# Altium PCB M_Rpl_9092_r1.PcbDoc
Units mil, origin at the board's own origin, x right, y up, seen from the top; angles counter-clockwise.
Board outline 1978.5 x 1584.8 mil, 2 copper layers (Top Layer, Top, Bottom Layer, Bottom); 39 components, 56 nets, 302 pads, 66 vias.
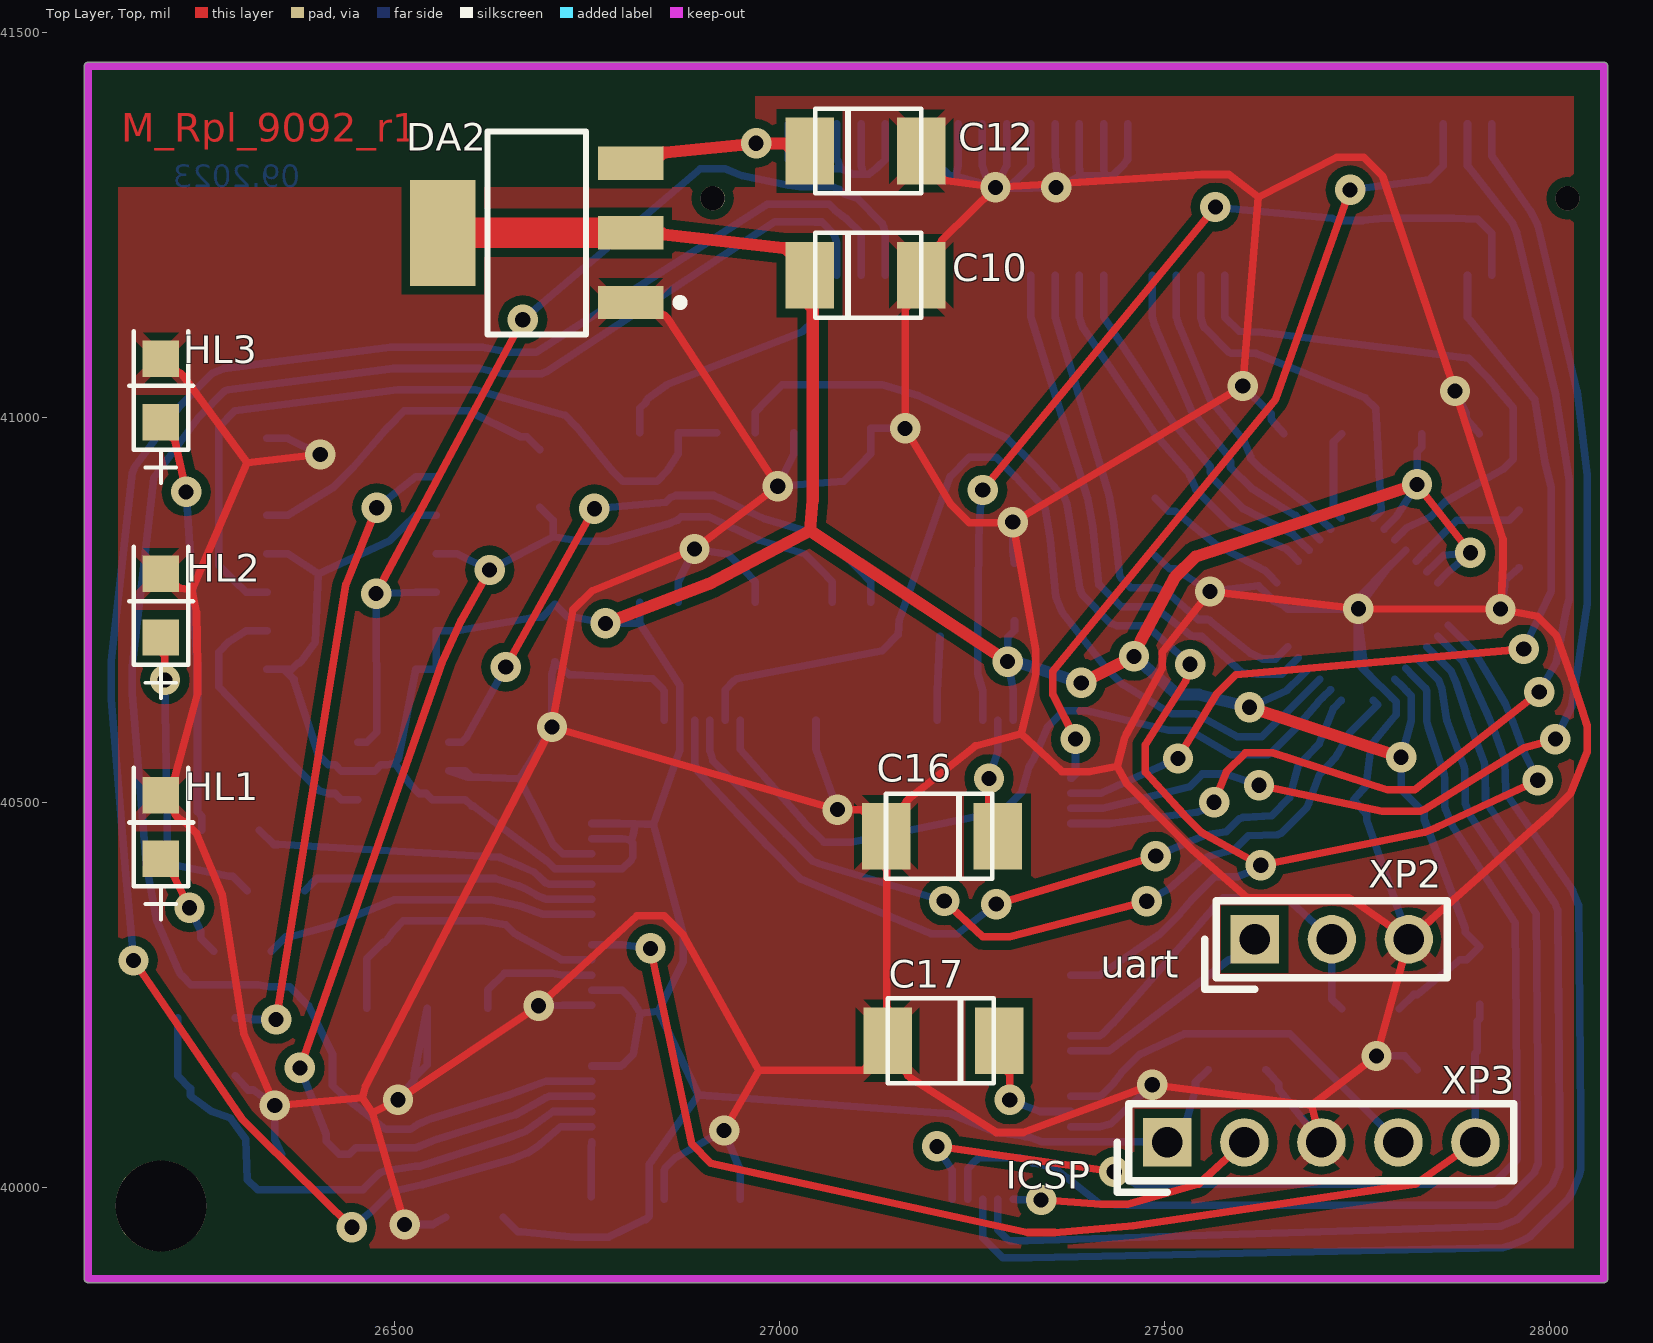
[diagram p0: Top Layer, Top view]
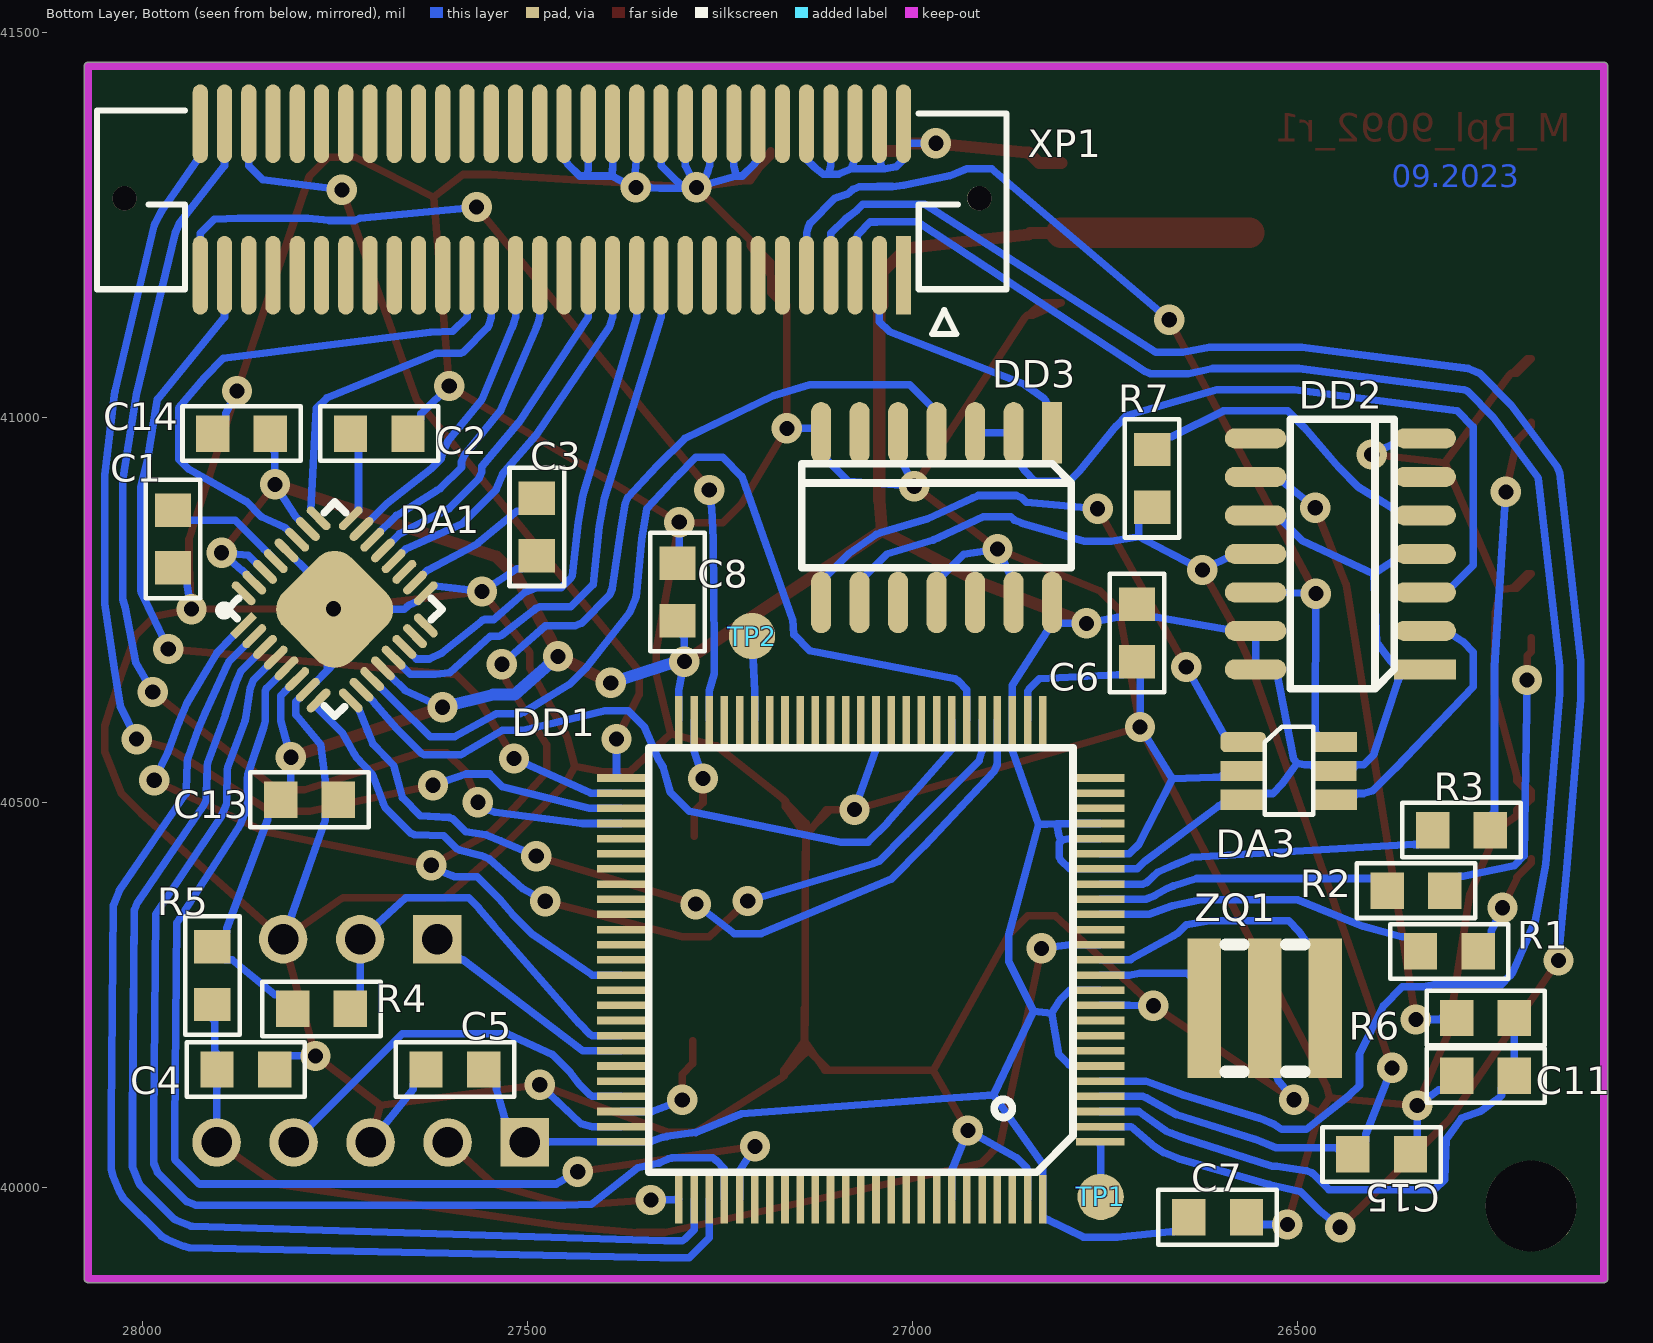
[diagram p1: Bottom Layer, Bottom view, seen from below]

## Layer stack, top to bottom
Top Solder, Top Mask: solder mask 0.4, Solder Resist, Dk 3.5
Top Layer, Top: signal copper 1.4
Dielectric 1: dielectric 12.6, FR-4, Dk 4.8
Bottom Layer, Bottom: signal copper 1.4
Bottom Solder, Bot Mask: solder mask 0.4, Solder Resist, Dk 3.5

## Board outline
26097.36,39881.89 26097.36,41456.69 cw(c26102.36,41456.69) 26102.36,41461.69 28070.87,41461.69 cw(c28070.87,41456.69) 28075.87,41456.69 28075.87,39881.89 cw(c28070.87,39881.89) 28070.87,39876.89 26102.36,39876.89 cw(c26102.36,39881.89)

## Design rules (kind name [scope] priority, off if disabled: settings)
Clearance [All] p1: gap=11.81 ignorepadtopadclearanceinfootprint=FALSE
ComponentClearance ComponentClearance_Design [All] p1: gap=9.84 collisioncheckmode=3 verticalgap=9.84 showdistances=FALSE
ComponentClearance [All] p2: gap=10 collisioncheckmode=3 verticalgap=10 showdistances=FALSE
PlaneClearance [All] p1: clearance=10
PolygonConnect PolygonConnect_2 [IsPolygon And InNet('GND') And OnLayer('Top Layer, Top') vs IsVia] p1: connectstyle=Direct reliefconductorwidth=0 reliefentries=4 polygonreliefangle="90 Angle" airgapwidth=10
PolygonConnect PolygonConnect_1 [IsPolygon And InNet('GND') And OnLayer('Top Layer, Top') vs IsPad] p2: connectstyle=Relief reliefconductorwidth=15 reliefentries=4 polygonreliefangle="45 Angle" airgapwidth=10
PolygonConnect [All] p3: connectstyle=Relief reliefconductorwidth=10 reliefentries=4 polygonreliefangle="90 Angle" airgapwidth=10
RoutingVias [All] p1: holewidth=28 width=50 viastyle="Through Hole" minholewidth=28 minwidth=50 maxholewidth=28 maxwidth=50
SolderMaskExpansion [All] p1: expansion=4 istentingtop=FALSE
Width [All] p1: maxlimit=10 minlimit=10 preferedwidth=10
28 further rules are at their usual default settings.

## Components (designator, comment, footprint, x,y, rotation, side; value= is the part's Value field where it differs from the comment)
C1 "10uF" SMD0805_C_0805(Primary) 27960.63,40842.52 r90 bottom
C2 "10uF" SMD0805_C_0805(Primary) 27692.85,40979.38 r0 bottom
C3 "10uF" SMD0805_C_0805(Primary) 27488.19,40858.27 r90 bottom
C4 "0,1u" SMD0805_C_0805(Primary) 27866.14,40153.54 r0 bottom
C5 "0,1u" SMD0805_C_0805(Primary) 27594.49,40153.54 r180 bottom
C6 "0,1u" SMD0805_C_0805(Primary) 26708.66,40720.47 r90 bottom
C7 "0,1u" SMD0805_C_0805(Primary) 26604.09,39961.73 r0 bottom
C8 "0,1u" SMD0805_C_0805(Primary) 27305.41,40773.79 r270 bottom
C10 "10,0u x 16V" COND_TC(B) 27047.24,41185.04 r0 top
C11 "270p" SMD0805_C_0805(Primary) 26255.91,40145.67 r180 bottom
C12 "10,0u x 16V" COND_TC(B) 27047.24,41346.46 r0 top
C13 "0,1u" SMD0805_C_0805(Primary) 27783.46,40503.94 r0 bottom
C14 "0,1u" SMD0805_C_0805(Primary) 27871.5,40979.43 r180 bottom
C15 "150p" SMD0805_C_0805(Primary) 26391.02,40043.48 r0 bottom
C16 "10,0u x 16V" COND_TC(B) 27275.59,40456.69 r180 top
C17 "10,0u x 16V" COND_TC(B) 27277.56,40190.94 r180 top
DA1 "TLV320AIC3254" QFN-32 27750.64,40751.17 r225 bottom
DA2 "LM1117-3.3" SOT-223_P 26685.04,41240.16 r90 top
DA3 "SN74LVC1G3157" SOT23-6 26570.87,40578.74 r180 bottom
DD1 "STM32F429VGT" LQFP100 27067.37,40295.96 r90 bottom
DD2 "74LVC74" SO14_M 26334.65,40673.23 r0 bottom
DD3 "74LVC04" SO14_M 26818.9,40980.32 r270 bottom
HL1 "Green" LED_0805 26196.85,40468.5 r90 top
HL2 "Green" LED_0805 26196.85,40755.91 r90 top
HL3 "Red" LED_0805 26196.85,41035.43 r90 top
R1 "1k" SMD0805 26303.15,40307.09 r0 bottom
R2 "1k" SMD0805 26346.46,40385.83 r0 bottom
R3 "1k" SMD0805 26287.4,40464.57 r0 bottom
R4 "7.5k" SMD0805 27767.72,40232.28 r0 bottom
R5 "7.5k" SMD0805 27909.45,40275.59 r90 bottom
R6 "22R" SMD0805 26255.91,40220.47 r180 bottom
R7 "22R" SMD0805 26688.98,40921.26 r270 bottom
TP1 "SCK" TP_RND 26755.91,39988.19 r90 bottom
TP2 "MOSI" TP_RND 27208.66,40716.54 r90 bottom
XP1 "{Value}" 5179030-2 27468.5,41283.46 r90 bottom
XP2 "uart" X3MALE 27617.51,40322.76 r180 top
XP3 "ICSP" X5MALE 27503.94,40059.06 r180 top
ZQ1 "8MHz" Z_ZTTCS_3 26542.75,40233.35 r180 bottom
ZQ1 "8MHz" Z_ZTTCS_3 26542.75,40233.35 r180 bottom

## Footprints (in the part's own frame and the unit in brackets; to place one, negate y for a bottom-side part, rotate by r counter-clockwise, add the part's x,y. Pads: shape width x height; smd on the part's side, far side on the other; paste and mask are expansions set on the pad)
5179030-2 [mm]
  rect 2.6x0.5 smd: 1(-2.5,-11.6)
  oval 2.6x0.5 smd: 2(2.5,-11.6) 3(-2.5,-10.8) 4(2.5,-10.8) 5(-2.5,-10) 6(2.5,-10) 7(-2.5,-9.2) 8(2.5,-9.2) 9(-2.5,-8.4) 10(2.5,-8.4) 11(-2.5,-7.6) 12(2.5,-7.6) 13(-2.5,-6.8) 14(2.5,-6.8) 15(-2.5,-6) 16(2.5,-6) 17(-2.5,-5.2) 18(2.5,-5.2) 19(-2.5,-4.4) 20(2.5,-4.4) 21(-2.5,-3.6) 22(2.5,-3.6) 23(-2.5,-2.8) 24(2.5,-2.8) 25(-2.5,-2) 26(2.5,-2) 27(-2.5,-1.2) 28(2.5,-1.2) 29(-2.5,-0.4) 30(2.5,-0.4) 31(-2.5,0.4) 32(2.5,0.4) 33(-2.5,1.2) 34(2.5,1.2) 35(-2.5,2) 36(2.5,2) 37(-2.5,2.8) 38(2.5,2.8) 39(-2.5,3.6) 40(2.5,3.6) 41(-2.5,4.4) 42(2.5,4.4) 43(-2.5,5.2) 44(2.5,5.2) 45(-2.5,6) 46(2.5,6) 47(-2.5,6.8) 48(2.5,6.8) 49(-2.5,7.6) 50(2.5,7.6) 51(-2.5,8.4) 52(2.5,8.4) 53(-2.5,9.2) 54(2.5,9.2) 55(-2.5,10) 56(2.5,10) 57(-2.5,10.8) 58(2.5,10.8) 59(-2.5,11.6) 60(2.5,11.6)
  round 0.8 hole 0.8 unplated: 61(0.04,14.1) 62(0.04,-14.1)
  silkscreen extent -4.44,-15 2.94,15
COND_TC(B) [mm]
  rect 1.6x2.2 smd mask-25.4: 1(-0.2,0) 2(3.48,0)
  silkscreen extent -0.02,-1.4 3.48,1.4
LED_0805 [mm]
  rect 1.2x1.2 smd: 1(-1.05,0) 2(1.05,0)
  silkscreen extent -3.05,-1.06 1.95,1.04
LQFP100 [mm]
  rect 0.25x1.6 smd: 1(-6,-7.9) 2(-5.5,-7.9) 3(-5,-7.9) 4(-4.5,-7.9) 5(-4,-7.9) 6(-3.5,-7.9) 7(-3,-7.9) 8(-2.5,-7.9) 9(-2,-7.9) 10(-1.5,-7.9) 11(-1,-7.9) 12(-0.5,-7.9) 13(0,-7.9) 14(0.5,-7.9) 15(1,-7.9) 16(1.5,-7.9) 17(2,-7.9) 18(2.5,-7.9) 19(3,-7.9) 20(3.5,-7.9) 21(4,-7.9) 22(4.5,-7.9) 23(5,-7.9) 24(5.5,-7.9) 25(6,-7.9) 51(6,7.9) 52(5.5,7.9) 53(5,7.9) 54(4.5,7.9) 55(4,7.9) 56(3.5,7.9) 57(3,7.9) 58(2.5,7.9) 59(2,7.9) 60(1.5,7.9) 61(1,7.9) 62(0.5,7.9) 63(0,7.9) 64(-0.5,7.9) 65(-1,7.9) 66(-1.5,7.9) 67(-2,7.9) 68(-2.5,7.9) 69(-3,7.9) 70(-3.5,7.9) 71(-4,7.9) 72(-4.5,7.9) 73(-5,7.9) 74(-5.5,7.9) 75(-6,7.9)
  rect 1.6x0.25 smd: 26(7.9,-6) 27(7.9,-5.5) 28(7.9,-5) 29(7.9,-4.5) 30(7.9,-4) 31(7.9,-3.5) 32(7.9,-3) 33(7.9,-2.5) 34(7.9,-2) 35(7.9,-1.5) 36(7.9,-1) 37(7.9,-0.5) 38(7.9,0) 39(7.9,0.5) 40(7.9,1) 41(7.9,1.5) 42(7.9,2) 43(7.9,2.5) 44(7.9,3) 45(7.9,3.5) 46(7.9,4) 47(7.9,4.5) 48(7.9,5) 49(7.9,5.5) 50(7.9,6) 76(-7.9,6) 77(-7.9,5.5) 78(-7.9,5) 79(-7.9,4.5) 80(-7.9,4) 81(-7.9,3.5) 82(-7.9,3) 83(-7.9,2.5) 84(-7.9,2) 85(-7.9,1.5) 86(-7.9,1) 87(-7.9,0.5) 88(-7.9,0) 89(-7.9,-0.5) 90(-7.9,-1) 91(-7.9,-1.5) 92(-7.9,-2) 93(-7.9,-2.5) 94(-7.9,-3) 95(-7.9,-3.5) 96(-7.9,-4) 97(-7.9,-4.5) 98(-7.9,-5) 99(-7.9,-5.5) 100(-7.9,-6)
  silkscreen extent -7,-7 7,7
QFN-32 [mm]
  rect 0.28x1 smd: 1(-1.75,-2.5)
  oval 0.28x1 smd: 2(-1.25,-2.5) 3(-0.75,-2.5) 4(-0.25,-2.5) 5(0.25,-2.5) 6(0.75,-2.5) 7(1.25,-2.5) 8(1.75,-2.5) 17(1.75,2.5) 18(1.25,2.5) 19(0.75,2.5) 20(0.25,2.5) 21(-0.25,2.5) 22(-0.75,2.5) 23(-1.25,2.5) 24(-1.75,2.5)
  oval 1x0.28 smd: 9(2.5,-1.75) 10(2.5,-1.25) 11(2.5,-0.75) 12(2.5,-0.25) 13(2.5,0.25) 14(2.5,0.75) 15(2.5,1.25) 16(2.5,1.75) 25(-2.5,1.75) 26(-2.5,1.25) 27(-2.5,0.75) 28(-2.5,0.25) 29(-2.5,-0.25) 30(-2.5,-0.75) 31(-2.5,-1.25) 32(-2.5,-1.75)
  rrect50% 3.2x3.2 smd: 33(0,0)
  silkscreen extent -2.65,-2.7 2.5,2.51
SMD0805 [mm]
  rect 1.1x1.2 smd: 1(-0.953,0) 2(0.947,0)
  silkscreen extent -1.95,-0.9 1.95,0.9
SMD0805_C_0805(Primary) [mm]
  rect 1.1x1.2 smd: 1(0.947,0) 2(-0.953,0)
  silkscreen extent -1.95,-0.9 1.95,0.9
SO14_M [mil]
  rect 80x26 smd: 1(0,0)
  oval 80x26 smd: 2(0,-50) 3(0,-100) 4(0,-150) 5(0,-200) 6(0,-250) 7(0,-300) 8(220,-300) 9(220,-250) 10(220,-200) 11(220,-150) 12(220,-100) 13(220,-50) 14(220,0)
  silkscreen extent 40,-325 175,25
SOT23-6 [mm]
  rrect50% 1.5x0.66 smd: 1(0,0)
  rect 1.5x0.66 smd: 2(0,-0.95) 3(0,-1.9) 4(3,-1.9) 5(2.997,-0.953) 6(3,0)
  silkscreen extent 0.71,-2.39 2.31,0.51
SOT-223_P [mm]
  rect 1.1x2.15 smd: 1(-2.3,-3.1) 2(0,-3.1) 3(2.3,-3.1)
  rect 3.5x2.15 smd: 4(0,3.1)
  silkscreen extent -3.35,-4.85 3.35,1.63
TP_RND [mil]
  round 60 smd: 1(0,0)
X3MALE [mm]
  rect 1.6x1.6 hole 1: 1(0,0)
  round 1.6 hole 1: 2(-2.54,0) 3(-5.08,0)
  silkscreen extent -6.35,-1.27 1.65,1.65
X5MALE [mm]
  rect 1.6x1.6 hole 1: 1(0,0)
  round 1.6 hole 1: 2(-2.54,0) 3(-5.08,0) 4(-7.62,0) 5(-10.16,0)
  silkscreen extent -11.43,-1.27 1.65,1.65
Z_ZTTCS_3 [mm]
  rect 1.1x4.6 smd: 1(-2,0) 2(2,0) 3(0,0)
  silkscreen extent -1.3,-2.1 1.3,2.1

## Part data
DD3: "Hex Schmitt-Trigger INVERTERS"

## Free pads (board coordinates)
  round 118.11 hole 118.11 unplated: 0(26196.85,39976.38)

## Via types
v1: diameter 39.37, hole 19.68, Top Layer, Top to Bottom Layer, Bottom, 66 vias

## Nets (pads, with @x,y where several pads share a name; then routed paths per layer and width w, separated by ;. In a path a pad name is that pad's centre, name@x,y a point inside that pad or via, vN(x,y) a via of type N, cw(c..) or ccw(c..) an arc to the next point about the centre after c; other vN are vias at no path point)
+3.3V: C5.1 C6.1 C7.1 C8.1 C10.1 C13.1 C14.1 DA1.6 DA1.12 DA1.26 DA1.30 DA1.31 DA2.2 DA2.4 DA3.3 DA3.5 DD1.6 DD1.11 DD1.19 DD1.21 DD1.22 DD1.28 DD1.50 DD1.75 DD1.100 DD2.1 DD2.4 DD2.10 DD2.13 DD2.14 DD3.14 R4.2 R5.2 XP3.1 | length 7327.8
  Top Layer, Top w9.84: v1(27828.27,40913.55) v1(27897.48,40824.73)
  Top Layer, Top w15.75: v1(26774.4,40732.96) 26908.72,40784.26 27039.91,40853.37 ; DA2.2 26847.44,41240.16 26849.41,41238.19 27004.61,41220.47 27007.87,41220.47 27039.37,41188.98 C10.1 27039.37,41145.72 27043.35,41141.73 27043.35,40892.4 27039.91,40853.37 ; v1(27296.55,40683.33) 27039.91,40853.37 ; v1(27392.05,40655.68) v1(27460.72,40690.11) 27469.2,40710.25 27513.94,40793.15 27540.46,40819.67 v1(27828.27,40913.55) ; v1(27610.6,40623.99) v1(27807.53,40559.06)
  Top Layer, Top w39.37: DA2.4 26605.31,41240.16 26764.76,41240.16 DA2.2
  Bottom Layer, Bottom w9.84: DD2.4 26361.65,40823.23 26401.39,40797.3 ; DD2.10 26527.65,40873.23 26512.89,40858.87 26494.78,40840.86 26401.39,40797.3 ; C7.1 26660.1,39943.03 26663.05,39943.03 26665.09,39943.03 26734.59,39935.55 26777.22,39935.55 26778.17,39935.94 26824.19,39958.36 26826.23,39958.36 26831.15,39963.28 DD1.100 26831.15,40016.43 26831.15,40030.7 26895.18,40120.52 ; DD1.6 26787.85,40158.17 26793.96,40158.17 26797.22,40160.13 26810.48,40173.39 26819.36,40226.83 ; DD1.11 26787.85,40256.59 26796,40256.59 26807.53,40245.06 26810.48,40241.36 26819.36,40226.83 ; DD1.21 26787.85,40453.44 26796,40453.44 26805.59,40451.99 26807.27,40450.38 ; DD1.22 26787.85,40473.13 26791.93,40473.13 26813.06,40472.69 ; DD3.14 DD3.14@26818.9,40733.32 ; DD1.50 27303.59,40638.48 27303.59,40646.63 v1(27296.55,40683.33) 27296.55,40714.83 27305.41,40723.69 C8.1 ; C5.1 27540.45,40136.81 27540.45,40129.92 27540.45,40127.88 27530.51,40092.59 27530.51,40090.55 27503.94,40063.98 XP3.1 27473.13,40059.06 27472.44,40059.74 27409.89,40059.74 DD1.75 27346.9,40059.74 27340.79,40059.74 27324.05,40065.82 27319.46,40066.63 27281.68,40071.85 27222.28,40096.16 26945.89,40116.78 26895.18,40120.52 ; v1(27610.6,40623.99) 27659.3,40645.96 27677.98,40664.59 DA1.12 ; DA1.26 27795.46,40865.59 27801.21,40871.36 v1(27828.27,40913.55) 27828.27,40955.81 27834.2,40961.74 C14.1 ; DA1.6 27809.38,40650.67 27815.13,40644.89 27820.87,40639.12 27820.87,40606.54 v1(27807.53,40559.06) 27807.53,40527.56 27807.53,40517.18 C13.1 27837.5,40487.2 27837.5,40480.32 27837.5,40478.28 27890.75,40336.59 27890.75,40334.55 27890.75,40331.59 R5.2 27892.72,40296.16 27885.83,40296.16 27883.79,40296.16 27828.71,40250.98 27826.67,40250.98 27823.72,40250.98 R4.2 ; 26401.39,40797.3 26397.28,40708.47 26379.57,40684.19 26376.69,40681.31 26374.65,40681.31 26366.57,40673.23 DD2.1 26356.72,40673.23 26369.72,40660.23 26369.72,40658.19 26400.59,40564.83 26401.89,40561.82 26414.39,40549.32 26423.34,40549.32 26431.42,40541.24 DA3.5 26474.31,40541.24 26482.39,40549.32 26491.12,40549.32 26500.85,40551.49 ; 26500.85,40551.49 26504.92,40556.36 26527.65,40673.23 DD2.14 DD2.13 26581.65,40723.23 26683,40741.04 26685.04,40741.04 26691.93,40741.04 C6.1 26725.39,40741.04 26732.28,40741.04 26734.32,40741.04 v1(26774.4,40732.96) DD3.14@26818.9,40733.32 ; 26500.85,40551.49 26520.09,40524.46 26532.54,40512.02 26541.34,40512.02 26549.42,40503.94 DA3.3 26592.31,40503.94 26600.39,40495.86 26602.43,40495.86 26698.37,40424.17 26708.55,40414.07 26724.85,40414.07 DD1.19 26787.85,40414.07 26796,40414.07 26807.53,40425.6 26809.83,40429.57 26809.83,40447.78 26807.27,40450.38 ; 26807.27,40450.38 26810.48,40458.83 26813.06,40472.69 ; 26813.06,40472.69 26836.56,40471.75 ; DD3.14@26818.9,40733.32 26870.52,40652.75 26870.52,40638.48 DD1.28 26870.52,40575.49 26870.52,40567.33 26836.56,40471.75 ; 26819.36,40226.83 26843,40229.39 ; 26836.56,40471.75 26875.07,40328.44 26875.07,40293.38 26843,40229.39 ; 26843,40229.39 26895.18,40120.52 ; DA1.30@27851.14,40809.91 DA1.30 DA1.30@27851.14,40809.91 ; DA1.30@27851.14,40809.91 27856.92,40815.66 27862.69,40821.4 v1(27897.48,40824.73) 27870.83,40801.74 DA1.31@27865.06,40795.99 ; DA1.31 DA1.31@27865.06,40795.99 ; DA1.31 DA1.31@27865.06,40795.99 ; DA1.31 DA1.31@27865.06,40795.99
  Bottom Layer, Bottom w15.75: v1(27296.55,40683.33) 27307.41,40683.33 v1(27392.05,40655.68) ; v1(27460.72,40690.11) 27517.22,40640.43 27545.01,40640.43 v1(27610.6,40623.99)
C4_9: DD3.1 XP1.3 | length 347.2
  Bottom Layer, Bottom w9.84: DD3.1 26818.9,41012.24 26826.98,41020.32 26826.98,41022.35 26829.86,41025.24 26854.14,41042.95 27030.62,41112.2 27043.31,41124.89 27043.31,41143.7 XP1.3
CS_16: DD1.51 XP1.56 | length 1078
  Top Layer, Top w9.84: v1(27384.68,40582.85) 27355.3,40640.46 27355.3,40670.91 27644.24,41023.64 v1(27741.33,41295.93)
  Bottom Layer, Bottom w9.84: DD1.51 27379.76,40532.18 27384.68,40537.1 v1(27384.68,40582.85) ; v1(27741.33,41295.93) 27843.76,41309.06 27862.2,41327.5 27862.2,41340.55 XP1.56
DAT1_15: DD1.54 XP1.58 | length 1477.3
  Top Layer, Top w9.84: v1(27564.73,40500.62) 27580.65,40540.28 27605.44,40565.07 27640.51,40565.07 27790,40516.73 27825.06,40516.73 v1(27987,40643.84)
  Bottom Layer, Bottom w9.84: DD1.54 27409.89,40473.13 27428.24,40473.13 27431.46,40473.38 27542.41,40487.58 27549.69,40490.6 27559.71,40500.62 v1(27564.73,40500.62) ; XP1.58 27893.7,41340.55 27893.7,41327.5 27952.22,41252.83 27957.68,41239.83 28008.41,41029.37 28025.86,40918.71 28025.86,40764.09 28022.63,40753.65 28009.12,40682.2 v1(27987,40643.84)
DAT2_14: DD1.53 XP1.60 | length 1500.9
  Top Layer, Top w9.84: v1(27622.98,40522.74) 27782.78,40489.17 27832.28,40489.17 27839.56,40492.19 27967.39,40571.52 v1(28007.87,40582.68)
  Bottom Layer, Bottom w9.84: DD1.53 27409.89,40492.81 27420.09,40492.81 27532.87,40520.76 27549.52,40537.32 27579.93,40537.32 v1(27622.98,40522.74) ; XP1.60 27925.2,41340.55 27975.59,41268.44 27983.72,41252.83 27985.24,41249.17 28035.97,41034.51 28049.13,40925.23 28049.13,40758.63 28036.68,40674.98 28029.32,40626.31 v1(28007.87,40582.68)
DST0_8: DD1.5 XP1.5 | length 2375
  Bottom Layer, Bottom w9.84: DD1.5 26724.85,40138.48 26697.36,40138.48 26647.6,40120.17 26549.65,40090.41 26530.63,40082.53 26529.73,40081.99 26520.87,40075.81 26488.89,40075.81 26432.98,40120.17 26419.72,40133.43 26419.72,40173.31 26388.88,40236.04 26364.09,40260.83 26337.42,40260.83 26323.21,40263.78 26235.84,40263.78 26224.31,40275.31 26221.36,40279.01 26191.8,40346.2 26178.05,40420.15 26159.8,40641.92 26159.8,40676.98 26187.36,40921.3 26246.44,41001.47 26279.41,41034.43 26284.22,41036.43 26498.74,41063.98 26610.55,41063.98 26642.06,41057.39 26691.57,41057.39 26698.84,41060.41 26994.06,41254.3 27029.14,41254.3 27046.79,41254.26 27054.86,41254.26 27071.19,41237.93 27074.8,41226.38 XP1.5
DSTI_7: DD1.2 XP1.7 | length 2572.1
  Top Layer, Top w9.84: v1(26161.42,40295.28) 26302.49,40089.22 26327.28,40064.43 v1(26444.88,39948.82)
  Bottom Layer, Bottom w9.84: v1(26161.42,40295.28) 26150.49,40414.63 26132.24,40634.7 26132.24,40684.2 26159.8,40928.52 26162.82,40935.79 26223.08,41017.08 26263.79,41057.79 26278.74,41063.98 26494.58,41091.54 26614.71,41091.54 26649.28,41084.95 26684.35,41084.95 26984.53,41277.31 27038.67,41277.31 27051.36,41277.23 27061.2,41277.23 27064.27,41277.23 27064.56,41277.11 27071.77,41269.94 27087.85,41257.87 27106.3,41239.43 27106.3,41226.38 XP1.7 ; v1(26444.88,39948.82) 26470.77,39969.67 26495.91,39994.68 26536.94,40004.28 26538.87,40004.77 26654.68,40037.74 26673.7,40045.63 26674.59,40046.17 26685.48,40053.14 26716.7,40079.43 26724.85,40079.43 DD1.2
F0_10: DA3.6 DD2.12 XP1.9 | length 1319
  Top Layer, Top w9.84: v1(26476.38,40771.65) v1(26666.81,41127.27)
  Bottom Layer, Bottom w9.84: DA3.6 26464.36,40578.74 26477.36,40591.74 26477.36,40593.78 v1(26476.38,40771.65) 26527.65,40773.23 DD2.12 ; v1(26666.81,41127.27) 26897.48,41323.43 26929.29,41323.43 26952.42,41314.08 27011.66,41302.16 27026.64,41300.31 27045.25,41300.31 27058.09,41300.2 27068.84,41300.2 27077.57,41296.58 27085.31,41290.2 27085.43,41290.15 27097.59,41286.42 27101.26,41284.9 27133.33,41252.83 27134.84,41249.17 27137.8,41239.43 27137.8,41226.38 XP1.9
GND: C1.2 C2.2 C3.2 C4.2 C5.2 C6.2 C7.2 C8.2 C10.2 C11.2 C12.2 C13.2 C14.2 C15.2 C16.2 C17.2 DA1.7 DA1.17 DA1.28 DA1.33 DA2.1 DA3.2 DD1.10 DD1.20 DD1.27 DD1.37 DD1.74 DD1.94 DD1.99 DD2.7 DD3.5 DD3.7 DD3.11 DD3.13 HL1.2 HL2.2 HL3.2 XP1.14 XP1.16 XP1.18 XP1.20 XP1.22 XP1.24 XP1.26 XP1.28 XP1.30 XP2.3 XP3.3 ZQ1.3@26542.75,40233.35 | length 15895.5
  Top Layer, Top w9.84: v1(26403.81,40952.41) 26309.01,40941.64 ; v1(26513.44,39952.36) 26471.69,40097.4 ; v1(26928.36,40074.46) 26973.3,40152.44 ; XP3.3 27691.09,40107.27 ; HL1.2 26215.55,40491.14 HL1.2@26215.55,40486.22 ; HL1.2 26196.85,40514.76 26215.55,40533.46 ; HL1.2 26196.85,40504.92 HL1.2@26215.55,40486.22 ; HL1.2 26215.55,40528.54 26215.55,40533.46 ; HL1.2@26215.55,40486.22 26215.55,40484.18 26218.43,40481.3 26229.85,40473.43 26243.11,40460.17 26276.44,40381.26 26304.23,40200.97 v1(26344.81,40106.75) 26458.55,40116.66 ; 26215.55,40533.46 26215.55,40535.5 26244.45,40641.92 26244.45,40676.98 26243.11,40747.57 26237.2,40776.72 ; HL2.2@26220.47,40778.54 26201.77,40797.24 HL2.2 26215.55,40778.54 HL2.2@26220.47,40778.54 ; HL2.2@26220.47,40778.54 26222.51,40778.54 26237.2,40776.72 ; HL3.2@26220.47,41058.07 26201.77,41076.77 HL3.2 26215.55,41058.07 HL3.2@26220.47,41058.07 ; HL3.2@26220.47,41058.07 26222.51,41058.07 26225.39,41055.19 26309.01,40941.64 ; 26237.2,40776.72 26309.01,40941.64 ; 26458.55,40116.66 26462.56,40131.95 v1(26704.72,40598.43) ; 26458.55,40116.66 26471.69,40097.4 ; 26471.69,40097.4 v1(26504.88,40114.42) v1(26687.45,40236.36) 26815.22,40353.23 26850.28,40353.23 26875.07,40328.44 26973.3,40152.44 ; v1(26704.72,40598.43) v1(27075.59,40491.13) 27107.09,40491.13 ; v1(26704.72,40598.43) 26732.08,40750.5 26756.87,40775.29 v1(26889.96,40829.54) v1(26998.08,40911.15) 26854.33,41129.99 26851.45,41132.87 DA2.1@26849.41,41132.87 ; DA2.1@26849.41,41132.87 26832.68,41149.61 DA2.1 26844.49,41132.87 DA2.1@26849.41,41132.87 ; 26973.3,40152.44 27107.02,40152.56 27109.06,40152.56 ; 27107.09,40491.13 27138.58,40459.63 C16.2 ; 27107.09,40491.13 27112.01,40491.13 C16.2 ; 27109.06,40152.56 27140.55,40184.06 C17.2 ; 27109.06,40152.56 27113.98,40152.56 C17.2 ; C16.2 27165.16,40495.08 27165.16,40500 ; C16.2 27138.58,40473.43 27165.16,40500 ; C16.2 27138.58,40414.37 27139.57,40413.39 ; C16.2 27139.57,40418.31 27139.57,40413.39 ; 27139.57,40234.25 27140.55,40233.27 C17.2 ; 27139.57,40234.25 27139.57,40229.33 C17.2 ; 27139.57,40234.25 27139.57,40413.39 ; C17.2 27140.55,40174.21 27167.13,40147.64 ; C17.2 27167.13,40152.56 27167.13,40147.64 ; C10.2@27163.39,41141.73 v1(27163.39,40986.28) 27221.85,40888.64 27246.64,40863.85 27281.7,40863.85 v1(27303.25,40864.44) ; C10.2@27163.39,41141.73 27184.25,41162.59 C10.2 ; C10.2@27163.39,41141.73 27163.39,41146.65 C10.2 ; 27165.16,40500 27165.16,40502.04 27168.04,40504.92 27254.82,40573.82 27314.1,40589.51 ; 27167.13,40147.64 27167.13,40145.6 27170.01,40142.72 27281.68,40071.85 27316.74,40071.85 v1(27484.25,40133.86) 27691.09,40107.27 ; C10.2 27184.25,41201.77 27210.83,41228.35 ; C10.2 27210.83,41223.43 27210.83,41228.35 ; 27210.83,41228.35 27210.83,41230.39 27213.71,41233.27 v1(27280.81,41299.21) ; C12.2@27215.75,41308.07 27184.25,41339.57 C12.2 27210.83,41308.07 C12.2@27215.75,41308.07 ; C12.2@27215.75,41308.07 27217.79,41308.07 v1(27280.81,41299.21) ; v1(27280.81,41299.21) v1@27359.25,41304.11 ; v1(27303.25,40864.44) 27333.3,40698.56 27333.3,40668.11 27314.1,40589.51 ; v1(27303.25,40864.44) v1(27601.91,41041.17) 27622.02,41286.45 ; 27314.1,40589.51 27367.15,40540.53 27402.21,40540.53 27438.93,40547.31 ; v1@27359.25,41304.11 27359.55,41303.8 v1(27359.55,41299.21) v1@27359.25,41304.11 ; v1@27359.25,41304.11 27548.77,41315.94 27583.83,41315.94 27622.02,41286.45 ; 27438.93,40547.31 27450.8,40525.44 27503.07,40472.07 27536.18,40438.96 27607.76,40376.7 27642.66,40376.7 27695.89,40376.89 27739.13,40376.89 27740.61,40376.27 XP2.3 ; 27438.93,40547.31 27447.78,40582.22 27450.8,40589.49 27497.15,40675.02 27497.15,40694.98 v1(27559.22,40774.39) v1(27751.97,40751.97) v1(27936.67,40751.53) ; 27622.02,41286.45 27723.8,41338.26 27758.86,41338.26 27783.65,41313.46 v1(27877.59,41034.68) 27939.81,40842.26 27939.81,40807.2 v1(27936.67,40751.53) ; 27691.09,40107.27 v1(27775.49,40171.24) XP2.3 ; XP2.3 28002.46,40486.87 28027.25,40511.67 28049.12,40565.59 28049.12,40599.76 28029.32,40661.37 28009.12,40717.27 27984.33,40742.06 v1(27936.67,40751.53)
  Bottom Layer, Bottom w9.84: C11.2 26310.14,40126.97 26315.06,40126.97 26317.1,40126.97 v1(26344.81,40106.75) 26344.81,40067.1 26344.81,40062.18 C15.2 ; DD2.7 26361.65,40973.23 v1(26403.81,40952.41) ; v1(26504.88,40114.42) 26526.02,40140.76 ZQ1.3@26526.02,40142.8 ; v1(26513.44,39952.36) 26544.94,39952.36 26549.86,39952.36 C7.2 ; v1(26687.45,40236.36) 26718.74,40236.91 26724.85,40236.91 DD1.10 ; DD1.20 26724.85,40433.76 26718.74,40433.76 26717.23,40435.04 26706.46,40445.82 26662.69,40531.12 ; DD1.99 26850.84,40016.43 26850.84,40022.55 26851.74,40025.81 26865,40039.07 v1(26928.36,40074.46) 26949.26,40022.55 26949.26,40016.43 DD1.94 ; DD1.27 26850.84,40638.48 26850.84,40644.59 26848.87,40647.86 26835.61,40661.12 26734.32,40666.24 26732.28,40666.24 26727.36,40666.24 C6.2 26704.72,40666.24 26704.72,40661.32 v1(26704.72,40598.43) 26662.69,40531.12 ; DD3.13 26868.9,40787.32 v1(26889.96,40829.54) 26933.66,40822.95 26954.54,40802.07 26968.9,40787.32 DD3.11 ; DD3.5 27018.9,40953.32 v1(26998.08,40911.15) 27083.66,40917.68 27104.54,40938.56 27118.9,40953.32 DD3.7 27118.9,40986.28 v1(27163.39,40986.28) ; DD1.37 27047.69,40575.49 27047.69,40569.37 v1(27075.59,40491.13) ; XP1.20@27295.27,41340.55 XP1.20 ; XP1.20 27295.28,41340.55 27295.28,41327.5 v1(27280.81,41299.21) ; v1(27303.25,40864.44) 27303.25,40832.94 27303.25,40828.02 C8.2 ; DD1.74 27409.89,40079.43 27416.01,40079.43 27430.69,40083.36 v1(27484.25,40133.86) ; C3.2 27506.89,40804.04 27511.81,40804.04 27513.85,40804.04 v1(27559.22,40774.39) DA1.17@27622.3,40782.07 ; v1(27601.91,41041.17) 27635.74,41007.92 27638.62,41005.04 27638.62,41003 27638.62,40998.08 C2.2 ; C5.2 27648.72,40134.84 27648.72,40129.92 27648.72,40127.88 XP3.3 ; v1(27775.49,40171.24) 27806.99,40171.24 27811.91,40171.24 C4.2 ; XP2.3 27762.7,40478.28 27762.7,40480.32 27762.7,40485.24 C13.2 27762.7,40522.64 27762.7,40527.56 27762.7,40529.6 27768.55,40575.2 27801.21,40614.68 27801.21,40630.98 DA1.7@27795.46,40636.75 ; v1(27877.59,41034.68) 27892.27,41005.09 27892.27,41003.05 27892.27,40998.13 C14.2 ; v1(27936.67,40751.53) 27941.93,40781.33 27941.93,40783.37 27941.93,40788.29 C1.2 ; ZQ1.3@26526.02,40142.8 26542.75,40159.54 26542.75,40233.35 26526.02,40147.72 ZQ1.3@26526.02,40142.8 ; 26600.39,40533.26 26592.31,40541.34 DA3.2 26595.47,40533.26 26600.39,40533.26 ; 26600.39,40533.26 26609.19,40533.26 26662.69,40531.12 ; XP1.14@27201.75,41334.43 27200.79,41335.39 XP1.14 27200.79,41340.55 XP1.14@27201.75,41334.43 ; XP1.14@27201.75,41334.43 27205.71,41329.54 27221.28,41313.98 27229.35,41313.98 ; 27229.35,41313.98 27232.28,41327.5 XP1.16@27232.28,41340.55 ; 27229.35,41313.98 v1(27280.81,41299.21) ; XP1.16@27232.28,41340.55 XP1.16 XP1.16@27232.28,41340.55 ; XP1.18@27263.78,41340.55 XP1.18 XP1.18@27263.78,41340.55 ; XP1.18@27263.78,41340.55 27263.78,41327.5 27266.73,41317.76 27268.25,41314.1 27280.81,41301.54 v1(27280.81,41299.21) ; v1(27280.81,41299.21) 27296.65,41299.21 27308.32,41309.06 27326.77,41327.5 XP1.22@27326.77,41340.55 ; v1(27280.81,41299.21) 27292.48,41299.21 27293.48,41298.21 27328.56,41298.21 27340.25,41298.56 27340.9,41299.21 v1(27359.55,41299.21) v1@27362.2,41299.21 ; XP1.22@27326.77,41340.55 XP1.22 XP1.22@27326.77,41340.55 ; XP1.24@27358.27,41340.55 v1@27362.2,41299.21 ; XP1.24@27358.27,41340.55 XP1.24 XP1.24@27358.27,41340.55 ; v1@27362.2,41299.21 27390.54,41313.98 ; XP1.26@27389.76,41340.55 XP1.26 XP1.26@27389.76,41340.55 ; XP1.26@27389.76,41340.55 27389.76,41327.5 27390.54,41313.98 ; 27390.54,41313.98 27421.89,41313.98 ; XP1.28@27421.26,41340.55 XP1.28 XP1.28@27421.26,41340.55 ; XP1.28@27421.26,41340.55 27421.26,41327.5 27421.89,41313.98 ; 27421.89,41313.98 27432.27,41313.98 27447.83,41329.54 XP1.30@27451.79,41334.43 ; XP1.30@27451.79,41334.43 27452.76,41335.39 XP1.30 27452.76,41340.55 XP1.30@27451.79,41334.43 ; DA1.17@27622.3,40782.07 DA1.17 ; DA1.17@27622.3,40782.07 DA1.17 ; DA1.17 27642.35,40762.02 27655.24,40756.09 27656.69,40754.65 27660.17,40751.17 DA1.33 ; DA1.33 27788.92,40803.37 27792.4,40806.85 ; DA1.33 DA1.33@27750.64,40765.09 ; DA1.33 27750.64,40681.57 27761.08,40671.13 ; DA1.33 27751.44,40751.97 v1(27751.97,40751.97) ; DA1.33 v1(27751.97,40751.97) ; DA1.33 27761.08,40671.13 ; DA1.33@27750.64,40765.09 27792.4,40806.85 ; DA1.33@27750.64,40765.09 27751.97,40763.76 v1(27751.97,40751.97) ; 27761.08,40671.13 DA1.7@27775.42,40656.8 ; DA1.7@27775.42,40656.8 DA1.7 ; DA1.7@27775.42,40656.8 DA1.7 ; DA1.7@27775.42,40656.8 DA1.7 ; DA1.7 DA1.7@27795.46,40636.75 ; DA1.7 DA1.7@27795.46,40636.75 ; DA1.7 DA1.7@27795.46,40636.75 ; 27792.4,40806.85 DA1.28@27803.26,40817.7 ; DA1.28@27803.26,40817.7 DA1.28 DA1.28@27803.26,40817.7
HSPKR+_37: DA1.23 XP1.33 | length 402.5
  Bottom Layer, Bottom w9.84: XP1.33 27515.75,41143.7 27515.75,41130.65 27518.7,41120.91 27520.22,41117.25 27559.59,41023.64 27603.52,40969.61 27604.06,40968.72 27611.95,40949.7 27612.2,40948.68 27612.27,40948.06 27612.27,40946.88 27624.82,40934.33 27682.56,40888.78 27687.15,40884.22 27705.82,40865.59 DA1.23
HSPKR-_36: DA1.22 XP1.31 | length 427.5
  Bottom Layer, Bottom w9.84: XP1.31 27484.25,41143.7 27484.25,41130.65 27487.2,41120.91 27488.72,41117.25 27535.05,41009.14 27582.27,40951.65 27585.93,40942.82 27585.93,40935.97 27613.91,40907.98 27617.83,40905.56 27670.44,40873.06 27673.22,40870.31 27676.01,40867.55 27691.9,40851.67 DA1.22
I2S_CK: DA1.2 DD1.78 | length 1631.4
  Bottom Layer, Bottom w9.84: DD1.78 27264.22,39953.44 27264.22,39935.09 27290.17,39909.15 27326.86,39909.15 27939.29,39922.24 27946.32,39924.01 27969.63,39933.67 27975.85,39937.41 28025.59,39987.14 28029.32,39993.36 28038.98,40016.67 28040.75,40023.7 28040.75,40094.41 28038.39,40366 28038.13,40367.02 28030.24,40386.04 28029.7,40386.94 27943.63,40512.09 27943.63,40516.18 27942.04,40553.3 27941.24,40558.07 27927.39,40596.43 27918.63,40617.56 27889.75,40679.88 27887.96,40682.86 27865.06,40706.35 DA1.2
I2S_MCK: DA1.1 DD1.64 DD3.4 | length 2059.3
  Top Layer, Top w9.84: v1(27533.57,40679.89) 27533.57,40668.32 27530.61,40665.36 27527.59,40658.08 27475.34,40575 27475.34,40539.93 27525.48,40484.36 27548.47,40461.37 v1(27625.21,40418.84) 27837.76,40461.61 27855.17,40468.82 v1(27984.93,40529.2)
  Bottom Layer, Bottom w9.84: DD3.4 26968.9,41007.32 26983.26,41022.07 27004.14,41042.95 27133.66,41042.95 27180.93,41028.61 27296.2,40973.04 27331.04,40938.2 27370.12,40896.47 27373.13,40889.19 27379.23,40853.74 27390.2,40778.39 27393.89,40769.46 27430,40733.36 27438.93,40729.67 27477.11,40729.67 v1(27533.57,40679.89) ; DD1.64 27409.89,40276.28 27416.01,40276.28 27494.64,40329.84 27519.43,40354.63 27536.32,40374.83 27565.43,40403.94 27594.81,40403.94 27611.94,40411.04 27619.74,40418.84 v1(27625.21,40418.84) ; DA1.1 27882.87,40716.37 27903.42,40694.92 27907.18,40688.65 27942.39,40629.52 27952.65,40604.77 27967.17,40565.82 v1(27984.93,40529.2)
I2S_SDI: DA1.5 DD1.80 | length 1526.3
  Top Layer, Top w9.84: v1(27204.75,40053.83) v1(27435.04,40020.82)
  Bottom Layer, Bottom w9.84: v1(27204.75,40053.83) 27224.85,40022.55 27224.85,40016.43 DD1.80 ; v1(27435.04,40020.82) 27463.06,40004.92 27925.56,40004.92 27927.04,40005.54 27957.45,40035.95 27958.07,40037.44 27958.07,40080.67 27955.71,40343.93 27875.92,40467.15 27873.8,40470.68 27865.04,40491.82 27864.03,40495.82 27864.03,40531.59 27863.44,40536.26 27842.77,40598.42 27840.54,40607.3 27840.54,40645.42 27839.18,40648.69 27823.3,40664.59 DA1.5
I2S_SDO: DA1.4 DD1.79 | length 1531
  Bottom Layer, Bottom w9.84: DD1.79 27244.54,40016.43 27244.54,40024.59 27256.07,40036.12 27259.77,40039.07 27308.05,40039.07 27312.8,40038.67 27317.24,40037.5 27329.37,40032.18 27357.24,40025.79 27417.51,39978.49 27451.65,39977.36 27931.04,39977.36 27942.66,39982.17 27980.82,40020.33 27985.63,40031.96 27985.63,40086.15 27983.27,40355.34 27897.3,40483.3 27890.56,40499.58 27890.56,40505.18 27890.17,40542.42 27889.37,40547 27867.13,40606.47 27866.13,40610.46 27860.2,40649.33 27855.85,40659.83 27837.22,40678.51 DA1.4
I2S_WS: DA1.3 DD1.77 | length 1534.9
  Bottom Layer, Bottom w9.84: DD1.77 27283.91,39953.44 27283.91,39945.29 27295.44,39933.76 27299.22,39931 27317.81,39931 27321.68,39931.2 27935.88,39949.8 27937.65,39950.25 27957.2,39958.36 27958.77,39959.3 28003.7,40004.22 28004.63,40005.79 28012.74,40025.34 28013.19,40027.11 28013.19,40091 28010.83,40360.86 28006.61,40371.04 27919.8,40498.33 27917.1,40504.85 27917.1,40510.94 27916.11,40548.15 27915.31,40552.91 27892.66,40614.23 27879.87,40653.24 27872.53,40670.97 27867.02,40676.54 27851.14,40692.43 DA1.3
IRQ_12: DD1.48 XP1.59 | length 1198.4
  Top Layer, Top w9.84: v1(27264.17,40906.17) v1(27566.3,41273.62)
  Bottom Layer, Bottom w9.84: v1(27264.17,40906.17) 27260.93,40881.97 27259.15,40842.32 27257.76,40699.4 27257.76,40667.26 27264.22,40645.26 27264.22,40638.48 DD1.48 ; v1(27566.3,41273.62) 27718.18,41258.86 27724.88,41256.23 27757.77,41256.23 27785.76,41258.86 27875.66,41258.86 27906.75,41257.87 27925.2,41239.43 27925.2,41226.38 XP1.59
LED_0: DD1.16 R1.2 | length 435
  Bottom Layer, Bottom w9.84: R1.2 26359.15,40325.79 26362.11,40325.79 26364.15,40325.79 26414.79,40339.57 26500.3,40374.1 26625.55,40374.1 26662.7,40366.22 26693,40355.18 26693.64,40355.02 26724.85,40355.02 DD1.16
LED_1: DD1.17 R2.2 | length 384.7
  Bottom Layer, Bottom w9.84: R2.2 26399.59,40401.66 26405.41,40401.66 26631.07,40401.66 26661.67,40391.9 26662.53,40391.57 26669,40388.9 26685.02,40379.82 26697.36,40374.7 26724.85,40374.7 DD1.17
LED_2: DD1.18 R3.2 | length 449.5
  Bottom Layer, Bottom w9.84: R3.2 26343.41,40445.87 26346.36,40445.87 26348.4,40445.87 26636.21,40429.22 26637.23,40428.96 26656.25,40421.08 26682.02,40409.78 26696.17,40396.5 26701.28,40394.39 26724.85,40394.39 DD1.18
M+_1: DA1.21 XP1.27 | length 467
  Bottom Layer, Bottom w9.84: XP1.27 27421.26,41143.7 27421.26,41130.65 27511.68,40993.53 27559.58,40937.01 27559.58,40930.17 27563.24,40921.33 27565.07,40919.27 27602.13,40882.21 27666.43,40849.24 27677.98,40837.75 DA1.21
M-_44: DA1.20 XP1.25 | length 491.3
  Bottom Layer, Bottom w9.84: XP1.25 27389.76,41143.7 27389.76,41130.65 27392.72,41120.91 27394.23,41117.25 27489.64,40976.57 27533.24,40926.1 27533.24,40924.92 27540.91,40906.41 27584.35,40862.96 27658.29,40829.57 27664.06,40823.83 DA1.20
MIC+_42: DA1.14 XP1.23 | length 664.5
  Bottom Layer, Bottom w9.84: XP1.23 27358.27,41143.7 27358.27,41130.65 27427.05,40903.11 27428.25,40898.33 27434.35,40864.4 27441.93,40794.66 27444.7,40790.88 27456.33,40779.24 27489.3,40779.24 27503.66,40773.3 27544.13,40737.97 27555.97,40737.97 27558.92,40736.75 27611.59,40694.39 27628.07,40686.68 27644.37,40686.68 27650.14,40692.43 DA1.14
MIC-_41: DA1.13 XP1.21 | length 724.7
  Bottom Layer, Bottom w9.84: XP1.21 27326.77,41143.7 27326.77,41130.65 27329.72,41120.91 27400.69,40894.67 27406.79,40859.26 27414.99,40783.5 27444.03,40754.46 27446.07,40754.45 27450.99,40754.45 27484.37,40754.46 27489.62,40752.28 27491.62,40750.37 27533.87,40717.53 27536.81,40716.31 27548.66,40716.31 27600.88,40669.28 27601.28,40669.11 27619.93,40667.02 27652.51,40667.02 27664.06,40678.51 DA1.13
NET00000: DD1.12 ZQ1.1@26621.49,40233.35 | length 167.7
  Bottom Layer, Bottom w9.84: ZQ1.1@26621.49,40233.35 26621.49,40257.03 26643.14,40278.68 26704.98,40278.68 26718.74,40276.28 26724.85,40276.28 DD1.12
NET00005: DD1.13 ZQ1.2@26464.01,40233.35 | length 392
  Bottom Layer, Bottom w9.84: ZQ1.2@26464.01,40233.35 26464.01,40297.33 26485.66,40318.98 26487.7,40318.98 26490.58,40321.87 26498.46,40333.28 26511.72,40346.54 26614.13,40346.54 26644.71,40341.81 26655.91,40330.68 26661.33,40327.44 26715.67,40297.52 26716.87,40296.37 26718.74,40295.96 26724.85,40295.96 DD1.13
NET00007: C3.1 DA1.18 | length 195.4
  Bottom Layer, Bottom w9.84: C3.1 27504.92,40878.84 27511.81,40878.84 27513.85,40878.84 27564.22,40837.23 27569.78,40833.9 27630.45,40801.74 27636.22,40795.99 DA1.18
NET00008: C2.1 DA1.24 | length 118.4
  Bottom Layer, Bottom w9.84: DA1.24 27719.74,40879.51 27719.74,40955.76 27719.74,40968.96 C2.1
NET00009: HL1.1 R1.1 | length 142.4
  Top Layer, Top w9.84: HL1.1 26196.85,40422.24 26215.55,40403.54 26215.55,40401.5 v1(26234.12,40363.73)
  Bottom Layer, Bottom w9.84: v1(26234.12,40363.73) 26248.92,40332.75 26248.92,40330.71 26248.92,40323.82 R1.1
NET00010: C1.1 DA1.29 | length 160.8
  Bottom Layer, Bottom w9.84: DA1.29 27837.22,40823.83 27842.96,40829.6 27855.35,40842.18 27880.03,40866.86 27937.01,40866.86 27947.67,40866.86 C1.1
NET00014: DD1.1 TP1.1 | length 71.7
  Bottom Layer, Bottom w9.84: TP1.1 26755.91,40054.82 26756.35,40055.26 DD1.1
NET00015: DD1.45 TP2.1 | length 109.6
  Bottom Layer, Bottom w9.84: DD1.45 27205.17,40638.48 27205.17,40644.59 TP2.1
NET00021: HL2.1 R2.1 | length 403.2
  Top Layer, Top w9.84: HL2.1 26196.85,40696.22 26202.13,40690.94 v1(26202.13,40659.45)
  Bottom Layer, Bottom w9.84: v1(26202.13,40659.45) 26205.61,40431.57 26218.87,40418.31 26285.26,40404.53 26287.3,40404.53 26290.26,40404.53 R2.1
NET00022: HL3.1 R3.1 | length 541.5
  Top Layer, Top w9.84: HL3.1 26196.85,40989.17 26215.55,40970.47 26215.55,40968.43 v1(26229.69,40903.76)
  Bottom Layer, Bottom w9.84: v1(26229.69,40903.76) 26244.45,40676.98 26244.45,40488.19 26249.9,40482.74 R3.1
NET00023: C16.1 DD1.49 | length 156.7
  Top Layer, Top w9.84: v1(27272.35,40531.5) 27272.35,40500 27283.46,40488.89 C16.1
  Bottom Layer, Bottom w9.84: v1(27272.35,40531.5) 27283.91,40567.33 27283.91,40575.49 DD1.49
NET00025: C17.1 DD1.73 | length 164.4
  Top Layer, Top w9.84: C17.1 27285.43,40161.42 27299.21,40147.64 v1(27299.21,40114.17)
  Bottom Layer, Bottom w9.84: v1(27299.21,40114.17) 27338.75,40099.11 27346.9,40099.11 DD1.73
NET00042: DD2.3 DD3.2 DD3.3 | length 1002.1
  Bottom Layer, Bottom w9.84: DD2.3 26307.65,40773.23 26292.89,40787.59 26272.01,40808.47 26272.01,40987.99 26292.89,41008.87 26504.22,41036.43 26605.07,41036.43 26721.98,41003.05 26735.24,40989.79 26783.26,40930.94 26796.52,40917.68 26836.35,40917.68 26841.19,40917.88 26854.33,40931.02 26868.9,40953.32 DD3.2 DD3.3
NET00045: DD2.5 R7.1 | length 422.8
  Bottom Layer, Bottom w9.84: DD2.5 26361.65,40873.23 26421.35,40910.09 26446.14,40934.88 26492.01,40987.99 26512.89,41008.87 26596.41,41008.87 26663.31,40975.49 26665.35,40975.49 26672.24,40975.49 R7.1
NET00047: DA3.4 DD2.2 | length 359.2
  Bottom Layer, Bottom w9.84: DD2.2 26307.65,40723.23 26285.27,40708.87 26272.01,40695.61 26272.01,40650.85 26373.03,40544.95 26402.44,40515.54 26414.58,40512.02 26423.23,40512.02 26431.31,40503.94 DA3.4
NET00049: DA3.1 DD3.8 | length 787.5
  Top Layer, Top w9.84: v1(26644.74,40676.25) v1(26759.84,40881.89)
  Bottom Layer, Bottom w9.84: DA3.1 26587.39,40578.74 26593.89,40585.24 v1(26644.74,40676.25) ; v1(26759.84,40881.89) 26852.52,40890.52 26858.16,40896.07 26865.3,40899.02 26914.63,40899.02 26921.77,40896.07 26980.55,40868.83 27042.32,40850.51 27047.14,40848.52 27083.66,40822.95 27104.54,40802.07 27118.9,40787.32 DD3.8
NET00050: DD2.9 R6.1 | length 825
  Top Layer, Top w9.84: v1(26346.56,40218.5) 26437.01,40783.46 v1(26477.24,40883.18)
  Bottom Layer, Bottom w9.84: R6.1 26313.09,40220.47 26315.06,40218.5 v1(26346.56,40218.5) ; v1(26477.24,40883.18) 26527.65,40923.23 DD2.9
RX1: DD1.69 XP2.1 | length 290
  Bottom Layer, Bottom w9.84: DD1.69 27409.89,40177.85 27428.24,40177.85 27583.97,40296.18 27586.01,40296.18 27612.59,40322.76 XP2.1
SAI1_FS_A: C11.1 DD1.3 R6.2 | length 732.7
  Bottom Layer, Bottom w9.84: R6.2 26218.6,40196.85 26218.6,40169.29 C11.1 26235.33,40128.94 26235.33,40122.05 26235.33,40120.01 26238.22,40117.13 26262.37,40099.41 26287.4,40090.55 26307.09,40062.99 26309.23,40010.48 26322.49,39997.22 26459.35,39997.22 26481.42,40019.22 26488.7,40022.24 26527.22,40028.12 26532.9,40028.12 26648.52,40065.05 26663.44,40070.59 26671.57,40073.96 26706.51,40099.11 26724.85,40099.11 DD1.3
SAI1_SCK_A: C15.1 DD1.4 DD2.11 DD3.9 R7.2 | length 1796.6
  Top Layer, Top w9.84: v1(26377.39,40155.78) 26562.99,40685.04 26586.61,40736.22 v1(26623.81,40802.41)
  Bottom Layer, Bottom w9.84: v1(26377.39,40155.78) 26411.59,40069.14 26411.59,40067.1 26411.59,40060.21 C15.1 26441.49,40043.48 26449.98,40051.97 26528.15,40051.97 26555.8,40063.11 26657.96,40095.14 26696.17,40116.68 26701.28,40118.8 26724.85,40118.8 DD1.4 ; DD2.11 26581.65,40823.23 v1(26623.81,40802.41) 26706.38,40845.57 ; R7.2 26706.38,40866.55 26706.38,40862.3 26706.38,40845.57 ; DD3.9 27068.9,40787.32 27054.54,40802.07 27033.66,40822.95 26973.33,40841.27 26966.05,40844.28 26907.41,40871.66 26872.52,40871.66 26868.05,40867.28 26858.09,40863.16 26777.37,40839.57 26742.31,40839.57 26706.38,40845.57
SCK_13: DD1.52 XP1.57 | length 1183.8
  Top Layer, Top w9.84: v1(27517.66,40557.46) 27568.28,40641.52 27593.07,40666.32 v1(27966.8,40699.74)
  Bottom Layer, Bottom w9.84: DD1.52 27409.89,40512.5 27418.05,40512.5 v1(27517.66,40557.46) ; XP1.57 27893.7,41143.7 27893.7,41130.65 27980.85,41023.84 27994,40943.47 28002.6,40909.07 28002.6,40775.77 28001.97,40773.99 v1(27966.8,40699.74)
SPI_MISO: DA1.11 DD1.31 | length 1225.9
  Bottom Layer, Bottom w9.84: DD1.31 26929.58,40638.48 26929.58,40646.63 26941.11,40658.17 26944.81,40661.12 27133.66,40697.68 27154.54,40718.56 27156.02,40737.85 27221.85,40923.7 27246.64,40948.49 27281.7,40948.49 27306.5,40923.7 27345.57,40881.97 27351.67,40842.32 27359.25,40767.66 27359.51,40766.64 27367.39,40747.62 27367.93,40746.72 27424.31,40675.03 27445.64,40653.69 27504.78,40617.87 27509.96,40615.72 27540.1,40615.72 27543.11,40614.48 27594.77,40585.77 27626.44,40585.77 27670.44,40629.28 27691.9,40650.67 DA1.11
SPI_MOSI: DA1.10 DD1.32 | length 985.9
  Bottom Layer, Bottom w9.84: DD1.32 26949.26,40575.49 26949.26,40569.37 27033.27,40473.6 27058.06,40448.81 27093.12,40448.81 27289.89,40489.17 27314.68,40513.96 27324.26,40546.48 27329.19,40554.7 27348.26,40597.93 27369.59,40619.27 27399.76,40619.27 27505.63,40593.98 27532.78,40593.98 27583.22,40564.07 27587.48,40562.3 27633.72,40562.3 27637.99,40564.07 27670.52,40596.61 27700.07,40630.98 27705.82,40636.75 DA1.10
SPI_SCK: DA1.8 DD1.30 | length 1125
  Top Layer, Top w9.84: v1(27214.3,40372.47) 27264.25,40326 27299.31,40326 v1(27477.11,40372.16)
  Bottom Layer, Bottom w9.84: DD1.30 26909.89,40575.49 26909.89,40567.33 26913.83,40554.7 27008.72,40459.1 27043.56,40424.26 27050.84,40421.25 v1(27214.3,40372.47) ; v1(27477.11,40372.16) 27506.36,40388.41 27549.96,40427.15 27559.85,40431.24 27587.93,40438.54 27592.33,40440.37 27609.3,40457.26 27646.63,40458.39 27651.87,40460.57 27685.15,40493.85 27687.33,40499.09 27701.67,40536.94 27722.87,40559.4 27725.41,40563.62 27740.68,40591.07 27776.98,40627.4 DA1.8
SPI_SS: DA1.9 DD1.29 | length 1101.1
  Top Layer, Top w9.84: v1(27281.78,40368.33) v1(27488.83,40430.73)
  Bottom Layer, Bottom w9.84: DD1.29 26890.21,40575.49 26890.21,40549.96 26893.82,40541.23 26985.36,40443.49 27027.95,40400.9 27196.77,40330.15 27231.83,40330.15 v1(27281.78,40368.33) ; v1(27488.83,40430.73) 27534.98,40450.52 27553.86,40458.35 27554.68,40458.55 27580.64,40462.2 27597.6,40479.09 27602.01,40480.91 27639.36,40483.19 27662.53,40506.36 27674.11,40548.35 27700.83,40576.35 27708.04,40593.76 27719.74,40622.83 DA1.9
SPKR+_39: DA1.27 XP1.37 | length 721.8
  Bottom Layer, Bottom w9.84: XP1.37 27578.74,41143.7 27578.74,41130.65 27597.19,41112.2 27626.67,41111.05 27895.13,41077 27919.92,41052.21 27953.3,41012.43 27953.3,40946.43 27940.04,40933.17 27865.67,40891.28 27845.72,40871.41 27815.16,40857.41 27809.38,40851.67 DA1.27
SPKR-_38: DA1.25 XP1.35 | length 468.9
  Bottom Layer, Bottom w9.84: XP1.35 27547.24,41143.7 27547.24,41130.65 27550.2,41120.91 27551.71,41117.25 27583.78,41085.18 27587.44,41083.66 27619.44,41083.49 27761.19,41025.64 27774.44,41012.38 27781.54,40879.51 DA1.25
SWCLK: DD1.76 XP3.2 | length 325.6
  Top Layer, Top w9.84: v1(27340.01,39984.21) 27417.51,39978.49 27452.57,39978.49 27544.81,40004.92 XP3.2
  Bottom Layer, Bottom w9.84: DD1.76 27307.79,39984.94 27308.52,39984.21 v1(27340.01,39984.21)
SWDIO: DD1.72 XP3.4 | length 513.1
  Bottom Layer, Bottom w9.84: DD1.72 27409.89,40118.8 27416.01,40118.8 27419.27,40120.76 27432.53,40134.02 27444.96,40150.13 27467.98,40173.15 27526.15,40199.8 27663.02,40199.8 XP3.4
TX1: DD1.68 R4.1 XP2.2 | length 535.9
  Bottom Layer, Bottom w9.84: DD1.68 27409.89,40197.54 27416.01,40197.54 27419.27,40199.5 27432.53,40212.76 27543.97,40340.13 27563.63,40363.52 27576.74,40376.63 27598.49,40376.63 27634.78,40376.7 27658.3,40376.7 XP2.2 27717.51,40255.91 27717.51,40244.99 R4.1
VCC3: C12.1 DA2.3 XP1.2 XP1.4 XP1.6 XP1.8 XP1.10 | length 726.8
  Top Layer, Top w15.75: DA2.3 26835.63,41330.71 26849.41,41344.49 26852.67,41344.49 v1(26969.95,41356.41) 27007.87,41356.41 27017.82,41346.46 C12.1
  Bottom Layer, Bottom w9.84: v1(26969.95,41356.41) 27011.81,41356.41 XP1.2 27011.81,41335.41 27012.79,41334.43 27021.44,41325.78 27036.17,41323.32 27040.01,41323.32 ; XP1.4 27043.31,41335.39 27042.34,41334.43 27040.01,41323.32 ; XP1.6 27074.8,41335.39 27075.77,41334.43 27080.22,41323.16 ; XP1.8 27106.3,41334.31 27106.55,41334.06 27106.55,41327.61 27109.19,41316.46 ; XP1.10 27137.79,41335.39 27136.83,41334.43 27128.17,41325.77 27116.28,41316.46 27109.19,41316.46 ; 27040.01,41323.32 27049.83,41323.32 27067.6,41323.16 27080.22,41323.16 ; 27080.22,41323.16 27096.32,41316.46 27109.19,41316.46
~RST: C4.1 DD1.14 R5.1 XP3.5 | length 1577.2
  Top Layer, Top w9.84: v1(26832.75,40310.91) 26886.04,40056.93 26910.83,40032.14 27322.48,39941.89 27357.54,39941.89 27459.79,39950.93 27825.56,40004.92 27827.04,40005.54 XP3.5
  Bottom Layer, Bottom w9.84: DD1.14 26787.85,40315.65 26796,40315.65 v1(26832.75,40310.91) ; XP3.5 27903.94,40129.92 27903.44,40130.41 C4.1 27903.44,40174.17 27906.44,40177.17 27906.44,40216.44 27909.45,40219.44 R5.1
pads on no net: DA1.15 DA1.16 DA1.19 DA1.32 DD1.7 DD1.8 DD1.9 DD1.15 DD1.23 DD1.24 DD1.25 DD1.26 DD1.33 DD1.34 DD1.35 DD1.36 DD1.38 DD1.39 DD1.40 DD1.41 DD1.42 DD1.43 DD1.44 DD1.46 DD1.47 DD1.55 DD1.56 DD1.57 DD1.58 DD1.59 DD1.60 DD1.61 DD1.62 DD1.63 DD1.65 DD1.66 DD1.67 DD1.70 DD1.71 DD1.81 DD1.82 DD1.83 DD1.84 DD1.85 DD1.86 DD1.87 DD1.88 DD1.89 DD1.90 DD1.91 DD1.92 DD1.93 DD1.95 DD1.96 DD1.97 DD1.98 DD2.6 DD2.8 DD3.6 DD3.10 DD3.12 XP1.1 XP1.11 XP1.12 XP1.13 XP1.15 XP1.17 XP1.19 XP1.29 XP1.32 XP1.34 XP1.36 XP1.38 XP1.39 XP1.40 XP1.41 XP1.42 XP1.43 XP1.44 XP1.45 XP1.46 XP1.47 XP1.48 XP1.49 XP1.50 XP1.51 XP1.52 XP1.53 XP1.54 XP1.55 XP1.61 XP1.62 ZQ1.1@26621.49,40233.35 ZQ1.2@26464.01,40233.35 ZQ1.3@26542.75,40233.35

## Polygon pours and split planes (outlines as drawn)
GND on Top Layer, Top "Top Layer, Top-GND" (solid, remove dead copper, pour order 0): 26299.21,40078.74 26141.73,40078.74 26141.73,41299.21 26968.5,41299.21 26968.5,41417.32 28031.5,41417.32 28031.5,39921.26 26299.21,39921.26

## Keep-outs
Keep-Out Layer, Board:
  lines w5: 26102.36,39881.89 28070.87,39881.89 28070.87,41456.69 26102.36,41456.69 26102.36,39881.89
  lines w10: 26102.36,39881.89 28070.87,39881.89 28070.87,41456.69 26102.36,41456.69 26102.36,39881.89

## Other copper
Top Layer, Top:
  text "M_Rpl_9092_r1" at 26145.67,41358.27 h36.91
Bottom Layer, Bottom:
  text "09.2023" at 26377.95,41299.21 h29.53